# EAGLE board sensor_2 (EAGLE 6.4)
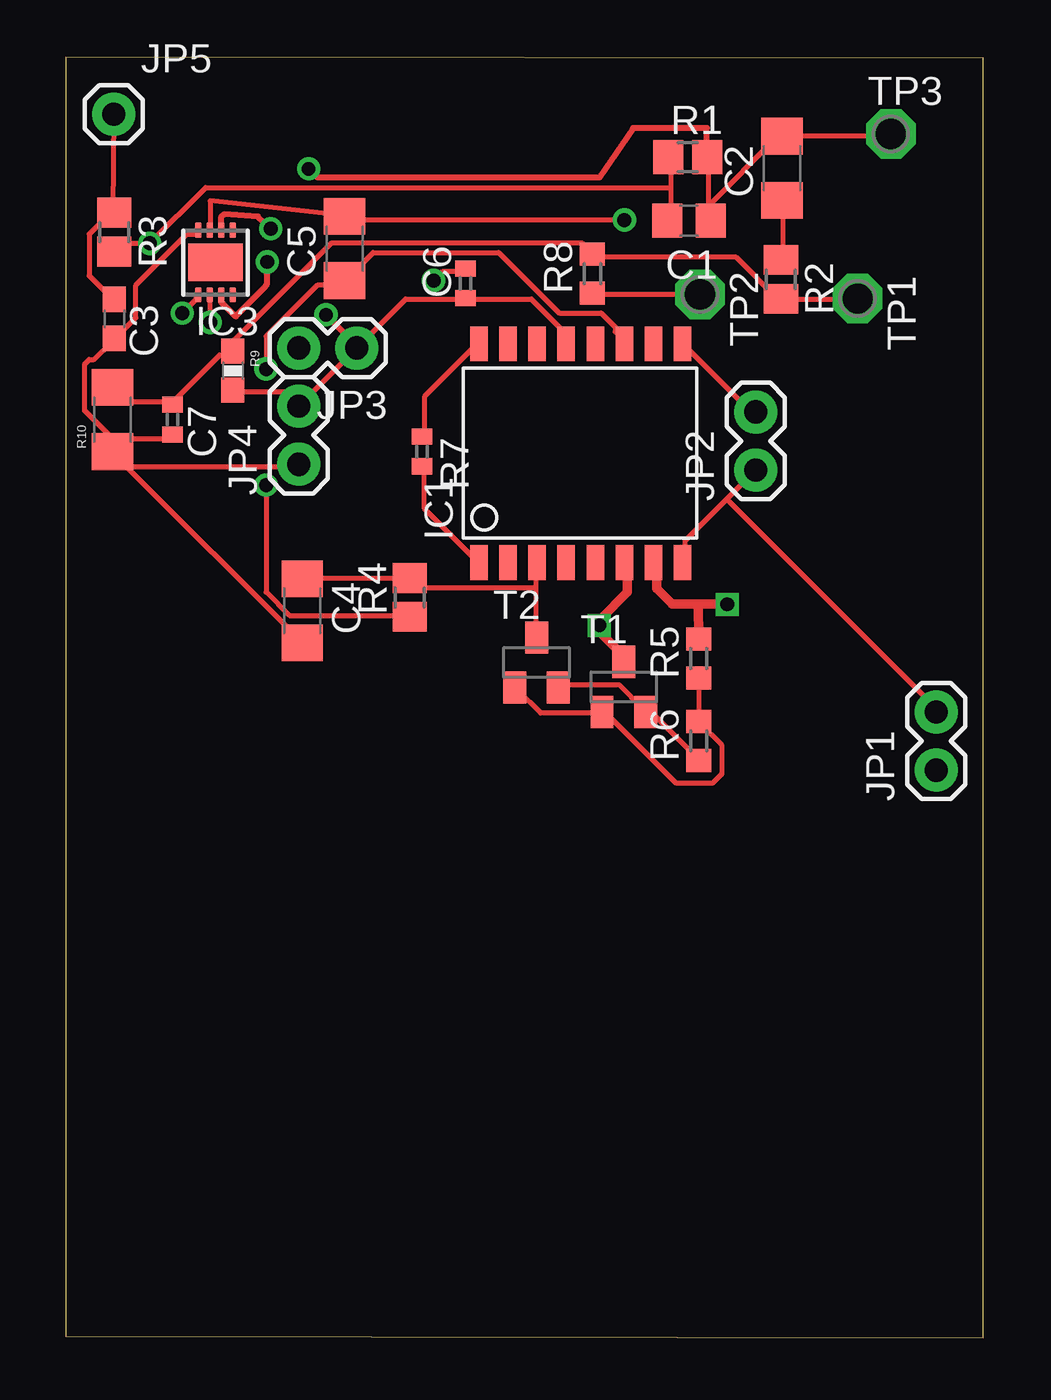
[diagram p0: board, top side]
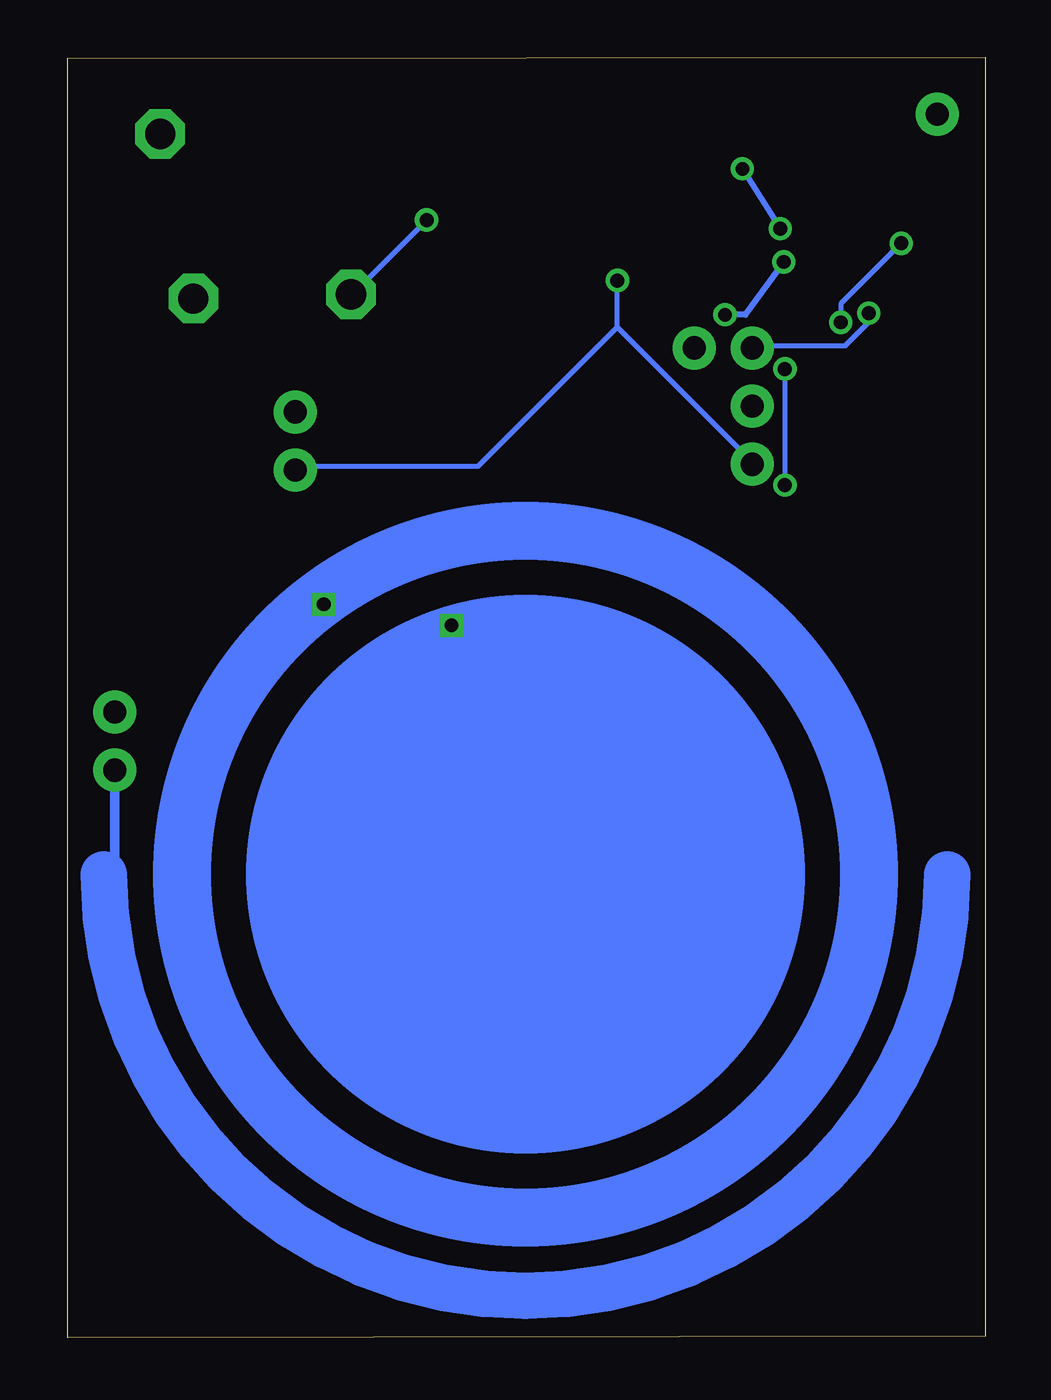
[diagram p1: board, bottom side, seen from below]

Size 40.06 x 55.93 mm. Coordinates in mm from the lower left corner, seen from the top.
Outline: 0,0.05 40.06,0 40.06,55.88 0,55.93 0,0.05
Copper layers (1*16): Top 0.035mm / dielectric 1.5mm / Bottom 0.035mm
Design rules "default *": minimum track width 9mil, minimum drill 24mil, track to track 7mil, track to pad 7mil, pad to pad 7mil, via to via 7mil, smd to smd 7mil, copper to edge 20mil, drill to drill 8mil, minimum pad ring 10mil, minimum via ring 8mil, stop-mask expansion 4mil, vias tented up to drill 0mil, thermal gap 10mil
bRestrict: area 0.1,0.1 to 39.4,36.6

## Footprints (pad centres in the part's own frame; a part is rotated, then mirrored left to right if it is on the bottom)
C0805 = smd 1.3 x 1.5: 1 -0.95,0; 2 0.95,0
C1206 = smd 1.6 x 1.8: 1 -1.4,0; 2 1.4,0
C0603 = smd 1.1 x 1: 1 -0.85,0; 2 0.85,0
C0402 = smd 0.7 x 0.9: 1 -0.65,0; 2 0.65,0
SO16-1 = smd 0.762 x 1.524: 1 -4.445,-4.775; 2 -3.175,-4.775; 3 -1.905,-4.775; 4 -0.635,-4.775; 5 0.635,-4.775; 6 1.905,-4.775; 7 3.175,-4.775; 8 4.445,-4.775; 9 4.445,4.775; 10 3.175,4.775; 11 1.905,4.775; 12 0.635,4.775; 13 -0.635,4.775; 14 -1.905,4.775; 15 -3.175,4.775; 16 -4.445,4.775
DFN8-3X3(MODIFIED12.2013) = smd 0.28 x 0.675: 1 -0.75,-1.413; 2 -0.25,-1.413; 3 0.25,-1.413; 4 0.75,-1.413; 5 0.75,1.413; 6 0.25,1.413; 7 -0.25,1.413; 8 -0.75,1.413 | smd 2.38 x 1.65: EXP 0,0
1X02 = drill 1.016 pad 1.88: 1 0,0; 2 2.54,0
1X01 = drill 1.016 pad 1.88: 1 0,0
R0805 = smd 1.3 x 1.5: 1 -0.85,0; 2 0.85,0
R0603 = smd 1 x 1.1: 1 -0.85,0; 2 0.85,0
R0402 = smd 0.7 x 0.9: 1 -0.65,0; 2 0.65,0
0603-RES = smd 1.1 x 1: 1 -0.85,0; 2 0.85,0
1206 = smd 1.6 x 1.8: 1 -1.4,0; 2 1.4,0
SOT23-BEC = smd 1 x 1.4: B -0.95,-1.1; C 0,1.1; E 0.95,-1.1
P1-13 = drill 1.321 pad 2.159 octagon: TP 0,0

## Placement (x,y rotation side)
C1  43nF  [C0805]  27.2,48.79 180 top
C2  100uF  [C1206]  31.27,51.08 90 top
C3  150nF  [C0603]  2.11,44.5 270 top
C4  100uF  [C1206]  10.31,31.75 270 top
C5  10uF  [C1206]  12.17,47.57 90 top
C6  0.1uF  [C0402]  17.45,46.05 90 top
C7  0.1uF  [C0402]  4.65,40.11 270 top
IC1  INA116U  [SO16-1]  22.48,38.63 0 top
IC3  LT6230LT6010(MOD12.2013)  [DFN8-3X3(MODIFIED12.2013)]  6.53,46.96 180 top
JP1  M02PTH  [1X02]  38,24.79 90 top
JP2  M02PTH  [1X02]  30.12,37.9 90 top
JP3  M02PTH  [1X02]  12.7,43.23 180 top
JP4  M02PTH  [1X02]  10.16,38.15 90 top
JP5  M01PTH  [1X01]  2.08,53.44 0 top
R1  38.3k  [R0805]  27.15,51.56 0 top
R2  2k  [R0805]  31.22,46.23 270 top
R3  10.5k  [R0805]  2.11,48.29 270 top
R4  80k  [R0805]  15.01,32.33 90 top
R5  60.4k  [R0603]  27.64,29.67 90 top
R6  20k  [R0603]  27.64,26.06 90 top
R7  1k  [R0402]  15.54,38.71 270 top
R8  20k  [R0603]  22.99,46.48 90 top
R9  14k  [0603-RES]  7.29,42.24 270 top
R10  6k  [1206]  2.03,40.11 90 top
T1  BC849SMD  [SOT23-BEC]  24.36,28.42 0 top
T2  BC849SMD  [SOT23-BEC]  20.55,29.49 0 top
TP1  TPPAD1-13  [P1-13]  34.57,45.39 270 top
TP2  TPPAD1-13  [P1-13]  27.69,45.57 270 top
TP3  TPPAD1-13  [P1-13]  36.02,52.58 0 top

## Library data of the parts
C1-C7 = eagle-ltspice; SPICEMODEL: NONE; SPICEPREFIX: C
IC1 = burr-brown; MF: TEXAS INSTRUMENTS; MPN: INA116UA; OC_FARNELL: 1212402; OC_NEWARK: 35C1717
IC3 = mylibrary
JP1-JP5 = SparkFun-Connectors
R1-R8 = resistor
R9 R10 = SparkFun-Resistors
T1 T2 = transistor-npn
TP1-TP3 = testpad

## Nets
1.5V: C7.1 R2.2 R8.2 R9.1 R10.2 TP1.TP
5V: C6.1 IC1.13 IC3.7 JP3.1 JP4.2 R9.2
AGND: C3.2 C4.2 C6.2 C7.2 IC1.8 IC3.4 JP1.2 JP2.1 JP4.1 R10.1
EN: IC3.5 JP3.2
G+: IC1.7 R5.2
GND_PLANE: JP1.1
IN+: IC1.6 T1.C
IN-: C4.1 IC1.3 R4.2 T2.C
N$1: IC1.1 R7.2
N$2: IC1.16 R7.1
N$3: C5.1 IC1.11 R4.1
N$4: C2.1 R2.1
N$9: C1.1 C2.2 IC3.2 R1.2 TP3.TP
N$10: C5.2 IC3.3 R8.1 TP2.TP
N$11: C1.2 IC3.6 R1.1 R3.2
OUTPUT: C3.1 JP5.1 R3.1
REF: IC1.9 JP2.2
RESET+: R5.1 R6.2 T1.B T2.B
RESET-: R6.1 T1.E T2.E

## Tracks (layer width: path | path; a pad name or v marks a point on that pad's centre or on a via)
1.5V
  Top 0.229: R10.2 2.64,40.89 4.47,40.89 C7.1 4.67,40.89 6.71,42.93 7.11,42.93 R9.1 7.32,43.13 7.32,43.54 11.58,47.8 22.55,47.8 22.96,47.4 R8.2 23.16,47.19 29.26,47.19 31.09,45.36 R2.2 31.29,45.36 34.54,45.36 TP1.TP
5V  (via drill 0.6)
  Top 0.229: R9.2 7.32,41.3 9.55,41.3 JP4.2 JP3.1 14.83,45.36 17.27,45.36 C6.1 17.48,45.36 20.32,45.36 21.74,43.94 21.74,43.54 IC1.13
  Top 0.254: IC3.7 6.78,45.24 7.42,44.6 7.42,44.63 8.66,45.87 8.74,45.97 8.79,46.02 8.79,46.25 8.79,46.74 v8.79,46.99 | v11.35,44.68 12.68,43.36 JP3.1
  Bottom 0.254: v11.35,44.68 10.46,44.68 v8.79,46.99
AGND  (via drill 0.61)
  Top 0.229: JP2.1 28.85,36.63 | 28.85,36.63 27.03,34.8 27.03,33.98 IC1.8 | 28.85,36.63 38,27.48 JP1.2 | v16.05,46.18 16.46,46.58 17.27,46.58 C6.2 | IC3.4 5.69,48.21 5.28,48.21 3.05,45.97 3.05,44.55 2.23,43.74 C3.2 2.03,43.54 1.22,42.72 1.02,42.72 0.81,42.52 0.81,40.49 2.23,39.06 | 2.23,39.06 2.03,38.86 R10.1 | 2.23,39.06 2.44,39.27 4.47,39.27 C7.2 | 2.64,38.05 2.03,38.66 R10.1 | 2.64,38.05 10.16,30.53 C4.2 | 2.23,39.06 R10.1 | 2.64,38.05 10.16,38.05 JP4.1 | 2.64,38.05 R10.1
  Bottom 0.229: 16.05,44.14 v16.05,46.18 | 16.05,44.14 10.16,38.25 JP4.1 | 16.05,44.14 22.15,38.05 30.07,38.05 JP2.1
EN  (via drill 0.61)
  Top 0.229: v5.08,44.75 5.69,45.36 IC3.5
  Bottom 0.229: v5.08,44.75 5.08,44.35 6.1,43.33 10.16,43.33 JP3.2
G+
  Top 0.229: 25.81,33.38 25.81,33.78 IC1.7
  Top 0.406: 25.81,33.38 25.81,32.71 26.47,32.05 27.61,32.05 | 28.83,32.05 27.61,32.05 | 27.61,32.05 R5.2
GND_PLANE
  Bottom 0.406: 38.48,20.24 38,20.24 JP1.1
  Bottom 2.032: 38.48,20.24 arc-180 1.65,20.24
IN+
  Top 0.229: 24.38,29.72 T1.C
  Top 0.406: 24.38,29.72 24.38,29.74 23.37,30.76 23.37,31.42 24.51,32.56 24.51,33.73 IC1.6
IN-
  Top 0.229: 20.52,32.77 20.52,33.78 IC1.3 | 20.52,32.77 20.52,30.73 T2.C | C4.1 10.36,33.17 14.83,33.17 R4.2 15.04,33.17 15.44,32.77 20.52,32.77
N$1
  Top 0.229: R7.2 15.65,38.05 15.65,36.22 17.88,33.98 IC1.1
N$2
  Top 0.229: R7.1 15.65,39.47 15.65,41.1 17.88,43.33 IC1.16
N$3  (via drill 0.61)
  Top 0.229: v8.74,37.24 8.74,32.56 9.75,31.55 14.83,31.55 R4.1 | v8.74,42.32 8.74,43.74 10.97,45.97 11.99,45.97 C5.1 12.19,46.18 13.41,47.4 18.9,47.4 21.54,44.75 23.37,44.75 23.98,44.14 23.98,43.94 24.38,43.54 IC1.11
  Bottom 0.229: v8.74,42.32 v8.74,37.24
N$4
  Top 0.229: R2.1 31.29,47.19 31.29,49.63 C2.1
N$5  (via drill 0.6)
  other vias: 28.88,32.03
N$9  (via drill 0.6)
  Top 0.229: 28.04,49.43 28.04,51.46 R1.2 | 28.04,49.43 28.04,48.82 C1.1 28.04,49.43 | 28.04,49.43 31.09,52.48 C2.2 31.29,52.48 35.97,52.48 TP3.TP
  Top 0.254: IC3.2 6.78,48.97 6.88,49.05 6.91,49.07 8.38,48.97 v8.94,48.44 | v10.59,51.05 10.97,50.67 23.29,50.67 24.77,52.83 27.99,52.83 27.99,51.66 R1.2
  Bottom 0.254: v10.59,51.05 v8.94,48.44
N$10  (via drill 0.61)
  Top 0.229: IC3.3 6.3,48.41 6.3,49.66 11.99,49.02 C5.2 12.19,48.82 v24.38,48.82 | TP2.TP 23.16,45.57 R8.1
  Bottom 0.229: v24.38,48.82 27.64,45.57 TP2.TP
N$11  (via drill 0.61)
  Top 0.229: 26.42,50.24 26.42,51.46 R1.1 | 26.42,50.24 26.42,48.82 C1.2 | v6.3,44.35 6.3,45.36 IC3.6 | R3.2 2.23,47.6 2.44,47.8 v3.66,47.8 6.1,50.24 26.42,50.24
  Bottom 0.229: v6.3,44.35 6.3,45.16 v3.66,47.8
N$13  (via drill 0.6)
  other vias: 23.29,31.11
OUTPUT
  Top 0.229: 2.03,49.22 1.02,48.21 1.02,46.38 2.03,45.36 C3.1 | JP5.1 2.03,49.22 | 2.03,49.22 R3.1
REF
  Top 0.229: IC1.9 27.03,43.33 30.07,40.28 JP2.2
RESET+
  Top 0.229: R5.1 R6.2 27.64,26.87 28.65,25.86 28.65,24.64 28.25,24.23 26.62,24.23 23.57,27.28 T1.B 23.37,27.28 20.73,27.28 19.71,28.3 T2.B
RESET-
  Top 0.229: R6.1 27.64,25.25 25.4,27.48 T1.E 25.2,27.48 24.18,28.5 21.54,28.5 T2.E
(copper drawn outside any net)
  shapes: Bottom circle x2